# EAGLE board interceptor (EAGLE 9.6.2)
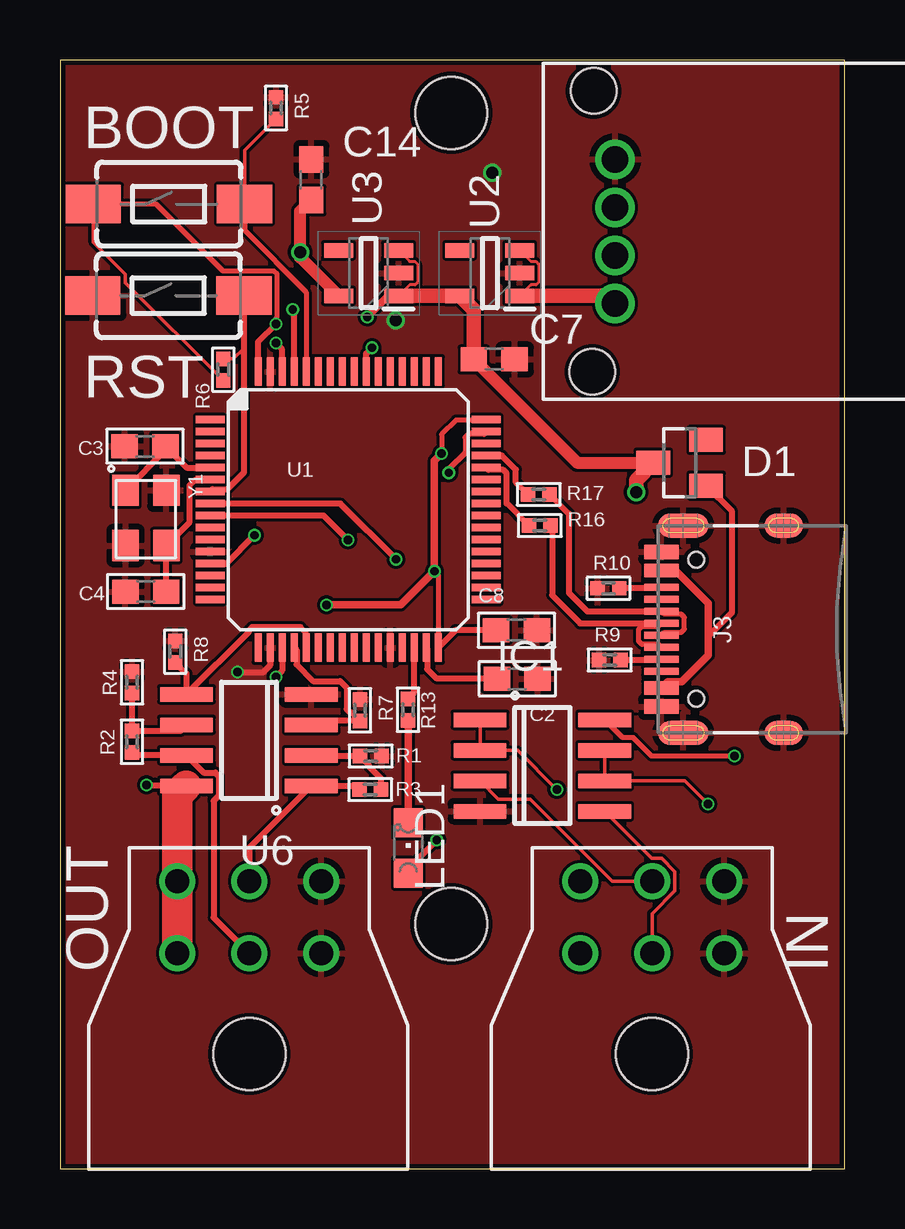
[diagram p0: board, top side]
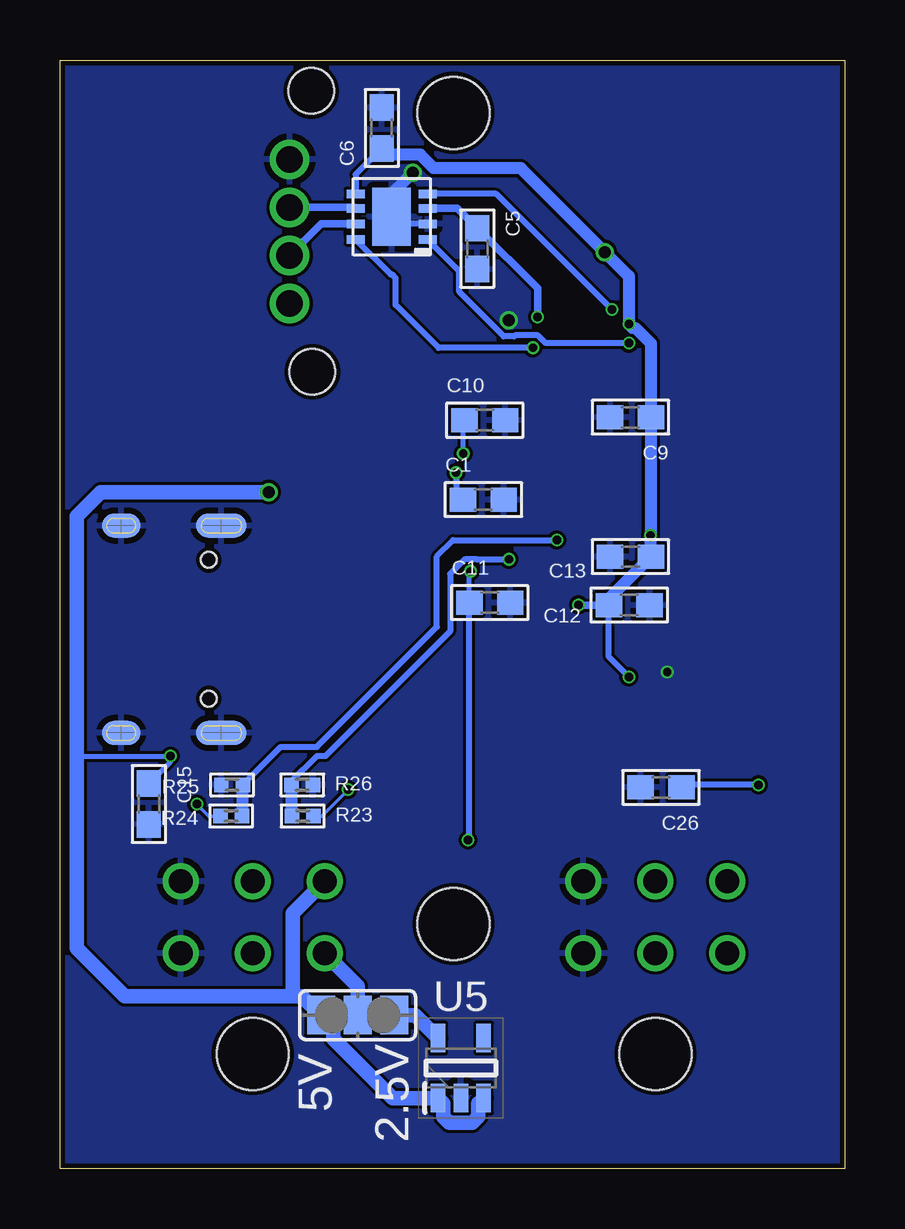
[diagram p1: board, bottom side, seen from below]

Size 32.7 x 46.2 mm. Coordinates in mm from the lower left corner, seen from the top.
Outline: 0,0 32.7,0 32.7,46.2 0,46.2 0,0
Copper layers (1*16): Top 0.035559375mm / dielectric 1.6mm / Bottom 0.035559375mm
Design rules "jlcpcb2layer": minimum track width 5mil, minimum drill 12mil, track to track 5mil, track to pad 5mil, pad to pad 5mil, via to via 5mil, smd to smd 5mil, copper to edge 8mil, drill to drill 6mil, minimum pad ring 5mil, minimum via ring 3mil, stop-mask expansion 2.5mil, vias tented up to drill 0mil, thermal gap 10mil
Holes 3 mm at 16.3,10.2 16.3,44

## Footprints (pad centres in the part's own frame; a part is rotated, then mirrored left to right if it is on the bottom)
0603-C = smd 1.1 x 1: 1 -0.85,0; 2 0.85,0
C0603 = smd 1.1 x 1: 1 -0.85,0; 2 0.85,0
SOT23 = smd 1 x 1.4: 1 -0.95,-1.1; 2 0.95,-1.1; 3 0,1.1
SO08 = smd 0.6 x 2.2: 1 -1.905,-2.6; 2 -0.635,-2.6; 3 0.635,-2.6; 4 1.905,-2.6; 5 1.905,2.6; 6 0.635,2.6; 7 -0.635,2.6; 8 -1.905,2.6
USB-C-BREAKOUT_SPARKFUN-CONNECTORS_USB-C-16P = smd 0.3 x 1.45: A5 -1.25,0; A6 -0.25,0; A7 0.25,0; A8 1.25,0; B5 1.75,0; B6 0.75,0; B7 -0.75,0; B8 -1.75,0 | smd 0.6 x 1.45: GND -3.225,0; GND2 3.225,0 | smd 1 x 2.1: SHLD1 -4.32,-0.915; SHLD2 4.32,-0.915 | smd 1 x 2.1 bottom: SHLD3 -4.32,-0.915; SHLD4 4.32,-0.915 | smd 1 x 1.6: SHLD5 -4.32,-5.095; SHLD8 4.32,-5.095 | smd 1 x 1.6 bottom: SHLD6 -4.32,-5.095; SHLD7 4.32,-5.095 | smd 0.55 x 1.45: VBUS1 -2.45,0; VBUS2 2.45,0 | hole 0.65: -2.89,-1.445; 2.89,-1.445
CHIPLED_0805 = smd 1.2 x 1.2: A 0,-1.05; C 0,1.05
0402-R = smd 0.6 x 0.6: 1 -0.45,0; 2 0.45,0
TACTILE_SWITCH_SMD_6.0X3.5MM = smd 2.3 x 1.6: 1 -3.15,0; 2 3.15,0
SJ_2 = smd 1.168 x 1.6: 1 -1.524,0; 2 0,0; 3 1.524,0
LQFP64 = smd 1.2 x 0.3: 1 -5.75,3.75; 2 -5.75,3.25; 3 -5.75,2.75; 4 -5.75,2.25; 5 -5.75,1.75; 6 -5.75,1.25; 7 -5.75,0.75; 8 -5.75,0.25; 9 -5.75,-0.25; 10 -5.75,-0.75; 11 -5.75,-1.25; 12 -5.75,-1.75; 13 -5.75,-2.25; 14 -5.75,-2.75; 15 -5.75,-3.25; 16 -5.75,-3.75; 33 5.75,-3.75; 34 5.75,-3.25; 35 5.75,-2.75; 36 5.75,-2.25; 37 5.75,-1.75; 38 5.75,-1.25; 39 5.75,-0.75; 40 5.75,-0.25; 41 5.75,0.25; 42 5.75,0.75; 43 5.75,1.25; 44 5.75,1.75; 45 5.75,2.25; 46 5.75,2.75; 47 5.75,3.25; 48 5.75,3.75 | smd 0.3 x 1.2: 17 -3.75,-5.75; 18 -3.25,-5.75; 19 -2.75,-5.75; 20 -2.25,-5.75; 21 -1.75,-5.75; 22 -1.25,-5.75; 23 -0.75,-5.75; 24 -0.25,-5.75; 25 0.25,-5.75; 26 0.75,-5.75; 27 1.25,-5.75; 28 1.75,-5.75; 29 2.25,-5.75; 30 2.75,-5.75; 31 3.25,-5.75; 32 3.75,-5.75; 49 3.75,5.75; 50 3.25,5.75; 51 2.75,5.75; 52 2.25,5.75; 53 1.75,5.75; 54 1.25,5.75; 55 0.75,5.75; 56 0.25,5.75; 57 -0.25,5.75; 58 -0.75,5.75; 59 -1.25,5.75; 60 -1.75,5.75; 61 -2.25,5.75; 62 -2.75,5.75; 63 -3.25,5.75; 64 -3.75,5.75
SOT95P280X145-5N = smd 1.2 x 0.6: 1 -1.25,0.95; 2 -1.25,0; 3 -1.25,-0.95; 4 1.25,-0.95; 5 1.25,0.95
HVSON8 = smd 0.75 x 0.35: 1 -1.5,0.95; 2 -1.5,0.3; 3 -1.5,-0.35; 4 -1.5,-0.95; 5 1.5,-0.95; 6 1.5,-0.35; 7 1.5,0.3; 8 1.5,0.95 | smd 1.6 x 2.4: PAD 0,0
MICROFIT-6 = drill 1: 1 3,0; 2 0,0; 3 -3,0; 4 3,-3; 5 0,-3; 6 -3,-3 | hole 3: 0,-7.2
MINI50 = drill 1.1: 1 0,0; 2 2,0; 3 4,0; 4 6,0 | hole 1.9: -2.85,-0.9; 8.85,-0.95
XTAL-3.2X2.5 = smd 1.3 x 1.1: 1 0,-1.8; 2 2.3,-1.8; 3 2.3,-0.1; 4 0,-0.1

## Placement (x,y rotation side)
C1  2.2uF  [0603-C]  15.06,27.88 0 bottom
C2  2.2uF  [0603-C]  19.05,20.42 180 top
C3  12pF  [0603-C]  3.54,30.11 180 top
C4  12pF  [0603-C]  3.58,24.05 180 top
C5  100nF  [0603-C]  15.31,38.34 270 bottom
C6  100nF  [0603-C]  19.29,43.37 90 bottom
C7  2.2u  [C0603]  18.09,33.73 0 top
C8  100nF  [0603-C]  19.02,22.44 0 top
C9  100nF  [0603-C]  8.93,31.32 180 bottom
C10  100nF  [0603-C]  15,31.19 0 bottom
C11  100nF  [0603-C]  14.79,23.59 0 bottom
C12  4.7uF  [0603-C]  8.98,23.49 0 bottom
C13  100nF  [0603-C]  8.93,25.51 180 bottom
C14  2.2u  [C0603]  10.47,41.21 90 top
C15  100nF  [0603-C]  29,15.2 270 bottom
C26  100nF  [0603-C]  7.66,15.89 180 bottom
D1  BAS40  [SOT23]  25.82,29.42 90 top
IC1  LM358D  [SO08]  20.1,16.8 270 top
J3  [USB-C-BREAKOUT_SPARKFUN-CONNECTORS_USB-C-16P]  25.06,22.48 90 top
LED1  [CHIPLED_0805]  14.51,13.37 0 top
R1  10k  [0402-R]  12.95,17.2 180 top
R2  10k  [0402-R]  3,17.79 270 top
R3  10k  [0402-R]  12.93,15.8 180 top
R4  10k  [0402-R]  3,20.27 270 top
R5  10k  [0402-R]  9,44.2 270 top
R6  10k  [0402-R]  6.8,33.3 90 top
R7  10k  [0402-R]  12.5,19.11 270 top
R8  10k  [0402-R]  4.8,21.55 270 top
R9  5.1k  [0402-R]  22.91,21.2 0 top
R10  5.1k  [0402-R]  22.85,24.19 0 top
R13  220  [0402-R]  14.5,19.13 270 top
R16  22  [0402-R]  19.99,26.8 0 top
R17  22  [0402-R]  19.95,28.1 0 top
R23  1k  [0402-R]  22.59,14.7 0 bottom
R24  1k  [0402-R]  25.57,14.7 180 bottom
R25  1k  [0402-R]  25.53,16 180 bottom
R26  1k  [0402-R]  22.61,16 0 bottom
S1  MOMENTARY-SWITCH-SPST-SMD-6.0X3.5MM  [TACTILE_SWITCH_SMD_6.0X3.5MM]  4.52,36.38 0 top
S2  MOMENTARY-SWITCH-SPST-SMD-6.0X3.5MM  [TACTILE_SWITCH_SMD_6.0X3.5MM]  4.54,40.2 0 top
SJ1  [SJ_2]  20.3,6.4 180 bottom
U1  STM32-M-64-LQFP  [LQFP64]  12.01,27.47 0 top
U2  MIC5233-5.0YM5-TR  [SOT95P280X145-5N]  17.91,37.32 180 top
U3  MIC5233-3.3YM5-TR  [SOT95P280X145-5N]  12.86,37.32 180 top
U4  TJA1042HVSON  [HVSON8]  18.88,39.67 180 bottom
U5  MIC5233-5.0YM5-TR  [SOT95P280X145-5N]  16,4.2 90 bottom
U6  MCP6002  [SO08]  7.87,17.86 90 top
U$1  MICROFIT-6  [MICROFIT-6]  7.89,11.98 0 top
U$2  MINI50-4  [MINI50]  23.13,42.06 270 top
U$3  MICROFIT-6  [MICROFIT-6]  24.67,11.98 0 top
Y1  16MHz  [XTAL-3.2X2.5]  4.53,28.27 270 top

## Library data of the parts
C1-C6 C8-C13 C15 C26 IC1 R1-R10 R13 R16 R17 R23-R26 U1 U4 U6 Y1 = comma.ai
C7 C14 = rcl; SPICEPREFIX: C
D1 = diode
J3 = ROTR-Wireless; PROD_ID: CONN-14122
LED1 = adafruit
S1 S2 = SparkFun-Switches; PROD_ID: SWCH-00815; SF_SKU: COM-08229
SJ1 = jumper
U2 U5 = SamacSys_Parts; DESCRIPTION: MICROCHIP - MIC5233-5.0YM5-TR - LDO, REG, 36VIN, 0.1A, 5V, 2%, 5SOT23; HEIGHT: 1.45mm; MANUFACTURER_NAME: Microchip; MANUFACTURER_PART_NUMBER: MIC5233-5.0YM5-TR; MOUSER_PART_NUMBER: 998-MIC5233-5.0YM5TR; MOUSER_PRICE-STOCK: https://www.mouser.co.uk/ProductDetail/Microchip-Technology-Micrel/MIC5233-50YM5-TR?qs=U6T8BxXiZAWSnpCHgrMajw%3D%3D
U3 = SamacSys_Parts; DESCRIPTION: High Input Voltage Low IQ UCAP LDO Regulator; HEIGHT: 1.45mm; MANUFACTURER_NAME: Microchip; MANUFACTURER_PART_NUMBER: MIC5233-3.3YM5-TR; MOUSER_PART_NUMBER: 998-MIC5233-3.3YM5TR; MOUSER_PRICE-STOCK: https://www.mouser.co.uk/ProductDetail/Microchip-Technology-Micrel/MIC5233-33YM5-TR?qs=U6T8BxXiZAWDhshLMgpaLQ%3D%3D
U$1-U$3 = interceptor

## Nets
3V3: C6.1 C8.1 C9.1 C10.1 C11.1 C12.1 C13.1 C14.1 LED1.A R6.1 S2.1 U1.13 U1.19 U1.32 U1.48 U1.64 U3.5 U4.5
5V: C5.1 C7.1 C15.1 D1.3 IC1.8 SJ1.3 U2.5 U3.1 U3.3 U4.3 U5.1 U5.3 U$3.3
12V: U2.1 U2.3 U$2.4
ACCEL1: IC1.3 U$3.2
ACCEL2: IC1.5 U$3.5
CAN1_EN: U1.55 U4.8
CAN1_H: U4.7 U$2.3
CAN1_L: U4.6 U$2.2
CAN1_RX: U1.61 U4.4
CAN1_TX: U1.62 U4.1
DAC1: R3.2 U6.1 U$1.2
DAC2: R2.2 U6.7 U$1.5
DACV: C26.1 U6.8 U$1.3 U$1.6
GND: C1.2 C2.1 C3.2 C4.2 C5.2 C6.2 C7.2 C8.2 C9.2 C10.2 C11.2 C12.2 C13.2 C14.2 C15.2 C26.2 IC1.4 J3.GND J3.GND2 J3.SHLD1 J3.SHLD2 J3.SHLD3 J3.SHLD4 J3.SHLD5 J3.SHLD6 J3.SHLD7 J3.SHLD8 R1.1 R4.1 R5.1 R7.1 R8.1 R9.1 R10.1 R25.2 R26.2 S1.1 U1.12 U1.18 U1.28 U1.63 U2.2 U3.2 U4.2 U4.PAD U5.2 U6.4 U$1.1 U$1.4 U$2.1 U$3.1 U$3.4 Y1.2 Y1.4
LEDG: R13.1 U1.30
N$1: C3.1 U1.5 Y1.1
N$2: R16.1 U1.44
N$3: C4.1 U1.6 Y1.3
N$4: R17.1 U1.45
N$5: J3.A7 J3.B7 R16.2
N$6: J3.A6 J3.B6 R17.2
N$7: R5.2 S2.2 U1.60
N$8: J3.A5 R9.2
N$9: J3.B5 R10.2
N$10: R6.2 S1.2 U1.7
N$11: D1.1 J3.VBUS1 J3.VBUS2
N$12: SJ1.2 U$3.6
N$13: IC1.1 IC1.2 R23.2
N$14: SJ1.1 U5.5
N$15: IC1.6 IC1.7 R24.2
N$17: R7.2 U1.20 U6.3
N$18: R8.2 U1.21 U6.5
N$21: R1.2 R3.1 U6.2
N$22: R2.1 R4.2 U6.6
N$26: LED1.C R13.2
N$41: R23.1 R26.1 U1.8
N$42: R24.1 R25.1 U1.9
VCAP1: C2.2 U1.31
VCAP2: C1.1 U1.47

## Tracks (layer width: path | path; a pad name or v marks a point on that pad's centre or on a via)
3V3  (via drill 0.35, 0.5)
  Top 0.152: R6.1 2.72,36.93 2.72,37.26 1.39,38.6 S2.1
  Top 0.2: v15.6,24.9 15.76,24.74 U1.32 | U1.48 17.74,31.2 16.5,31.2 15.9,30.6 v15.9,29.8 | S2.1 4,40.2 6.79,37.41 8.91,37.41 9.05,37.27 9.05,35.49 9,35.44 v9,35.2
  Top 0.254: C8.1 16.48,22.44 U1.32 | U1.19 9.26,20.76 v9,20.5 | U1.13 6.92,25.22 v8.1,26.4 | U1.64 8.26,34.46 v9,35.2 | LED1.A 14.51,12.51 v15.7,13.7
  Top 0.305: v11.1,23.5 14.2,23.5 v15.6,24.9 15.6,29.5 v15.9,29.8
  Top 0.508: U3.5 10,37.98 v10,38.2 10,39.89 C14.1
  Bottom 0.2: C11.1 15.64,24.86 v15.6,24.9 | v15.9,29.8 15.9,31.14 C10.1
  Bottom 0.254: v9,20.5 9.83,21.33 C12.1 | 8.1,25.53 C13.1 | C6.1 20.38,41.43 U4.5 | v15.7,13.7 15.64,13.76 C11.1
  Bottom 0.305: C12.1 v11.09,23.49 v11.1,23.5
  Bottom 0.508: 8.1,25.53 v8.1,26.4 8.08,26.42 C9.1 8.08,34.39 8.73,35.04 8.84,35.04 v9,35.2 9,37.2 v10,38.2 13.5,41.7 17.13,41.7 17.69,42.26 19.03,42.26 C6.1 | C13.1 9.83,23.76 C12.1
5V  (via drill 0.35, 0.5)
  Top 0.127: U3.3 14.57,37.81 14.79,37.81 14.9,37.7 14.9,36.94 14.79,36.83 14.57,36.83 U3.1
  Top 0.2: IC1.8 23.44,17.96 23.89,17.96 24.66,17.2 v28.1,17.2
  Top 0.305: U3.1 13.67,36.37 v12.8,35.5
  Top 0.508: C7.1 21.55,29.42 D1.3
  Top 0.61: U3.1 U2.5 17.24,35.79 C7.1 | D1.3 24,28.7 v24,28.2
  Bottom 0.2: 32,17.2 v28.1,17.2 28.1,16.95 C15.1
  Bottom 0.305: v12.8,35.5 12.8,36.68 C5.1 16.14,40.02 U4.3
  Bottom 0.61: v24,28.2 31,28.2 32,27.2 32,17.2 32,9.2 30,7.2 23,7.2 | 23,7.2 22.62,7.2 SJ1.3 21.32,5.89 21.32,5.42 18.84,2.95 U5.1 16.73,2.73 16.73,2.17 16.48,1.92 15.52,1.92 15.27,2.17 15.27,2.73 U5.3 | U$3.3 23,10.65 23,7.2
12V
  Top 0.127: U2.3 19.62,37.81 19.84,37.81 19.95,37.7 19.95,36.94 19.84,36.83 19.62,36.83 U2.1
  Top 0.61: U2.1 22.82,36.37 U$2.4
ACCEL1
  Top 0.152: IC1.3 18.27,15.4 19.6,15.4 23.02,11.98 U$3.2
ACCEL2
  Top 0.152: IC1.5 24.66,12.93 25.07,12.93 25.62,12.38 25.62,11.58 24.67,10.63 U$3.5
CAN1_EN  (via drill 0.35)
  Top 0.254: U1.55 12.76,33.97 v13,34.21
  Bottom 0.254: U4.8 18.92,37.26 18.86,37.26 18.72,37.12 18.72,36 16.93,34.21 v13,34.21
CAN1_H
  Bottom 0.305: U4.7 21.82,39.37 U$2.3
CAN1_L
  Bottom 0.305: U4.6 20.42,40.06 U$2.2
CAN1_RX  (via drill 0.35)
  Top 0.254: U1.61 9.76,35.74 v9.7,35.8
  Bottom 0.254: v9.7,35.8 14.52,40.62 U4.4
CAN1_TX  (via drill 0.35)
  Top 0.254: U1.62 9.26,34.14 v9,34.4
  Bottom 0.254: U4.1 16.06,37.4 16.06,36.53 14.21,34.68 13.79,34.68 13.74,34.73 12.79,34.73 12.46,34.4 v9,34.4
DAC1
  Top 0.254: U$1.2 7.89,13.38 U6.1 12.32,15.96 R3.2
DAC2
  Top 0.254: U$1.5 6.4,10.47 6.4,15.33 6.62,15.55 6.62,16.36 6.47,16.51 5.99,16.51 U6.7 3.12,17.22 R2.2
DACV  (via drill 0.35)
  Top 0.254: U6.8 3.65,15.96 v3.6,16
  Top 1.27: U$1.6 U$1.3 4.89,15.57 U6.8
  Bottom 0.254: v3.6,16 6.7,16 C26.1
GND  (via drill 0.35, 0.5)
  Top 0.254: U1.18 8.76,20.99 8.47,20.7 v7.4,20.7
  Bottom 0.254: U4.2 18.58,39.37 U4.PAD
  Bottom 0.508: U4.PAD 18.88,40.62 v18,41.5
  other vias: 14,35.36
  pour Top: 0,0.2 0,46.2 32.7,46.2 32.7,0.2
  pour Bottom: 0,0.2 0,46.2 32.7,46.2 32.7,0.2
LEDG
  Top 0.254: R13.1 14.76,19.84 U1.30
N$1
  Top 0.254: Y1.1 4.39,29.93 C3.1 5.28,29.22 U1.5
N$2
  Top 0.254: R16.1 18.61,27.73 18.61,28.97 18.46,29.12 17.86,29.12 U1.44
N$3
  Top 0.254: C4.1 Y1.3 5.41,26.95 5.41,28.47 5.63,28.7 6.24,28.7 U1.6
N$4
  Top 0.254: R17.1 19,28.61 19,29.13 18.41,29.72 U1.45
N$5
  Top 0.203: J3.B7 24.94,21.85 24.24,21.85 24.11,21.98 24.11,22.47 24.24,22.61 24.94,22.61 J3.A7
  Top 0.254: R16.2 20.5,26.74 20.5,23.9 21.67,22.73 J3.A7
N$6
  Top 0.203: J3.B6 25.18,23.11 25.88,23.11 26.01,22.97 26.01,22.48 25.88,22.35 25.18,22.35 J3.A6
  Top 0.254: R17.2 21.2,27.3 21.2,24 21.97,23.23 J3.B6
N$7
  Top 0.152: S2.2 7.69,42.44 R5.2
  Top 0.2: S2.2 7.69,39.1 10.26,36.53 U1.60
N$8
  Top 0.254: J3.A5 25.03,21.2 R9.2
N$9
  Top 0.254: J3.B5 25.02,24.19 R10.2
N$10
  Top 0.152: R6.2 7.22,33.75 7.67,34.2
  Top 0.254: U1.7 6.36,28.32 6.96,28.32 7.67,29.02 7.67,34.2 S1.2
N$11
  Top 0.254: 27,22.2 28,23.2 28,27.39 D1.1
  Top 0.305: J3.VBUS1 25.33,20.3 25.9,20.3 27,21.4 27,22.2 27,23.56 25.63,24.93 J3.VBUS2
N$12
  Bottom 0.61: SJ1.2 20.3,7.61 U$3.6
N$13  (via drill 0.35)
  Top 0.152: IC1.1 IC1.2 19.07,17.43 v20.7,15.8
  Bottom 0.152: v20.7,15.8 21.8,14.7 R23.2
N$14
  Bottom 0.61: U5.5 17.9,6.4 SJ1.1
N$15  (via drill 0.35)
  Top 0.152: v27,15.2 26.04,16.16 IC1.6 IC1.7
  Bottom 0.152: v27,15.2 26.5,14.7 R24.2
N$17
  Top 0.254: U6.3 10.63,18.66 R7.2 12.15,19.01 12.1,19.01 11.95,19.15 11.95,20.05 11.68,20.32 10.55,20.32 9.86,21.02 9.86,21.62 U1.20
N$18
  Top 0.254: R8.2 5.27,20.63 U6.5 7.86,22.35 7.86,22.43 8.01,22.57 10.02,22.57 10.24,22.35 10.24,21.74 U1.21
N$21
  Top 0.254: R3.1 13.38,16.26 12.85,16.79 12.85,16.85 R1.2 10.49,17.2 U6.2
N$22
  Top 0.254: U6.6 5.01,18.24 R2.1 R4.2
N$26
  Top 0.305: LED1.C 14.5,18.37 R13.2
N$41  (via drill 0.35)
  Top 0.254: v14,25.4 11.68,27.72 U1.8
  Bottom 0.254: v14,25.4 15.37,25.4 15.39,25.42 15.81,25.42 16.44,24.79 16.44,22.4 21.64,17.2 22,17.2 23.06,16.14 R26.1
  Bottom 0.508: R23.1 23.04,15.98 R26.1
N$42  (via drill 0.35)
  Top 0.254: v12,26.2 10.98,27.22 U1.9
  Bottom 0.254: v12,26.2 16.32,26.2 17,25.52 17,22.58 22,17.58 23.5,17.58 R25.1
  Bottom 0.508: R24.1 25.08,14.74 R25.1
VCAP1
  Top 0.254: U1.31 15.3,21.68 15.3,20.82 15.7,20.42 C2.2
VCAP2  (via drill 0.35)
  Top 0.254: v16.2,29 16.2,29.16 16.91,29.87 16.91,30.47 17.05,30.62 17.66,30.62 U1.47
  Bottom 0.254: v16.2,29 16.2,28.17 C1.1

## Text on the board
tNames: BOOT | RST | OUT | IN
bNames: 2.5V | 5V